# Altium PCB Pot_PCB.PcbDoc
Units mil, origin at the board's own origin, x right, y up, seen from the top; angles counter-clockwise.
Board outline 435 x 770 mil, 2 copper layers (Top Layer, Bottom Layer); 3 components, 5 nets, 10 pads, 0 vias.
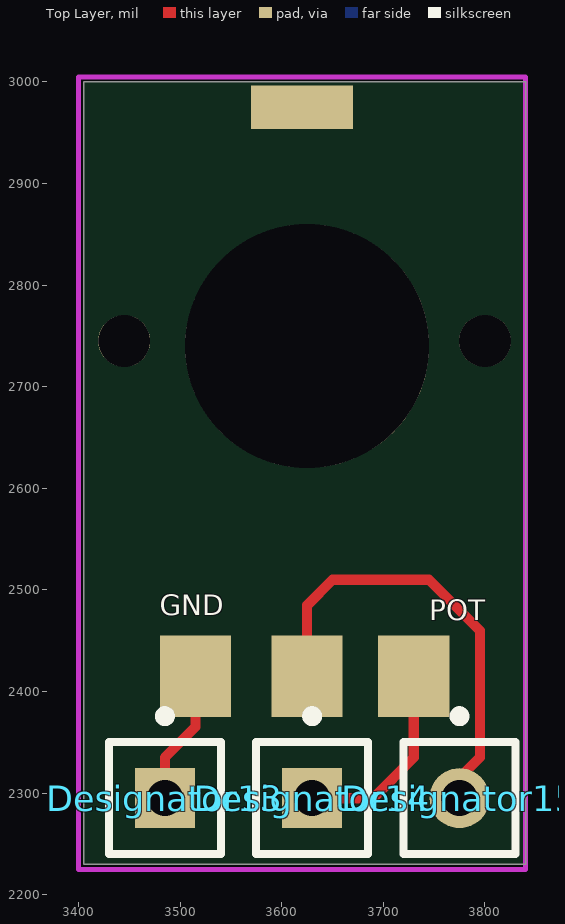
[diagram p0: Top Layer view]
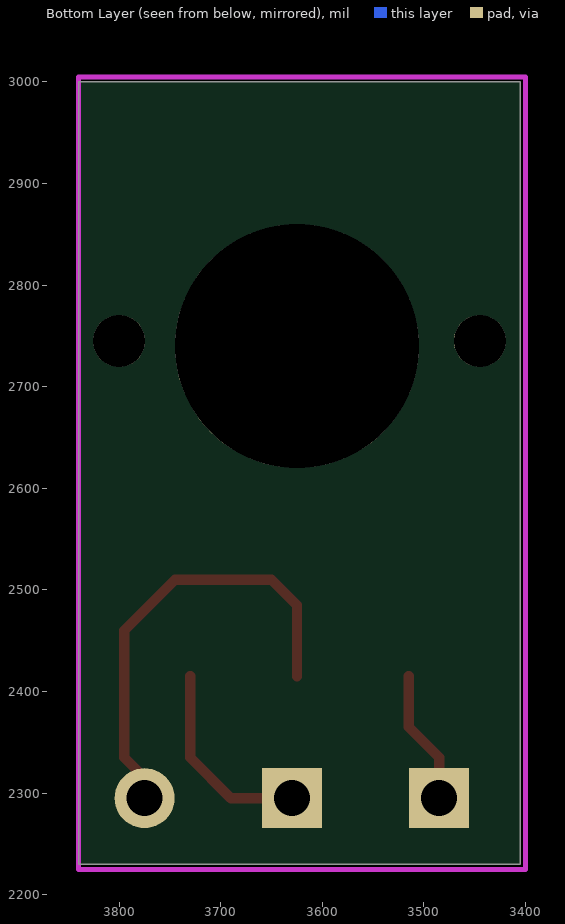
[diagram p1: Bottom Layer view, seen from below]

## Layer stack, top to bottom
Top Solder: solder mask 0.4, Solder Resist, Dk 3.5
Top Layer: signal copper 1.4
Dielectric 1: dielectric 12.6, FR-4, Dk 4.8
Bottom Layer: signal copper 1.4
Bottom Solder: solder mask 0.4, Solder Resist, Dk 3.5

## Board outline
3405,2230 3840,2230 3840,3000 3405,3000

## Design rules (kind name [scope] priority, off if disabled: settings)
Clearance [All] p1: gap=10
PolygonConnect [All] p1: connectstyle=Relief reliefconductorwidth=10 reliefentries=4 polygonreliefangle="90 Angle" airgapwidth=10
RoutingVias [All] p1: holewidth=28 width=50 viastyle="Through Hole" minholewidth=28 minwidth=50 maxholewidth=28 maxwidth=50
SolderMaskExpansion [All] p1: expansion=4
Width [All] p1: maxlimit=10 minlimit=10 preferedwidth=10
30 further rules are at their usual default settings.

## Components (designator, comment, footprint, x,y, rotation, side; value= is the part's Value field where it differs from the comment)
Designator13 "Comment" PIN1#1 3485,2295 r0 top
Designator14 "Comment" PIN1#1 3630,2295 r0 top
Designator15 "Comment" PIN1#2 3775,2295 r0 top

## Footprints (in the part's own frame and the unit in brackets; to place one, negate y for a bottom-side part, rotate by r counter-clockwise, add the part's x,y. Pads: shape width x height; smd on the part's side, far side on the other; paste and mask are expansions set on the pad)
PIN1#1 [mm] "Connector; Plug"
  rect 1.5x1.5 hole 0.9: 1(0,0)
  silkscreen extent -1.4,-1.4 1.4,2.17
PIN1#2 [mm] "Connector; Plug"
  round 1.5 hole 0.9: 1(0,0)
  silkscreen extent -1.4,-1.4 1.4,2.17

## Free pads (board coordinates)
  rect 70x80 smd: 0(3515,2415) 1(3625,2415) 2(3730,2415)
  rect 100x43 smd: 5(3620,2975)
  round 240 hole 240: 7(3625,2740)
  round 51.1 hole 51.1: 8(3445,2745) 9(3800,2745)

## Nets (pads, with @x,y where several pads share a name; then routed paths per layer and width w, separated by ;. In a path a pad name is that pad's centre, name@x,y a point inside that pad or via, vN(x,y) a via of type N, cw(c..) or ccw(c..) an arc to the next point about the centre after c; other vN are vias at no path point)
GND: Designator13.1 pad.0 | length 138.6
  Top Layer w10: Designator13.1@3500,2295 3485,2310 3485,2335 3515,2365 pad.0
POT: Designator15.1 pad.1 | length 444.4
  Top Layer w10: pad.1 3625,2485 3650,2510 3745,2510 3795,2460 3795,2335 3775,2315 Designator15.1
VCC: Designator14.1 pad.2 | length 196.6
  Top Layer w10: Designator14.1 3690,2295 3730,2335 pad.2
VOUT1: 
VOUT2: 

## Keep-outs
Keep-Out Layer:
  lines w5: 3400,2225 3400,3005 3840,3005 3840,2225 3400,2225

## Silkscreen, mask and mechanical layers (free items; w line width, h text height)
Top Overlay:
  text "GND" at 3480,2475 h20
  text "POT" at 3745,2470 h20